# Altium PCB correctCore.PcbDoc (part 1 of 2)
Units mil, origin at the board's own origin, x right, y up, seen from the top; angles counter-clockwise.
Board outline 6000 x 4000 mil, 4 copper layers (Top Layer, Layer 1, Layer 2, Bottom Layer), stack 23.756 mil thick; 90 components, 166 nets, 637 pads, 374 vias.
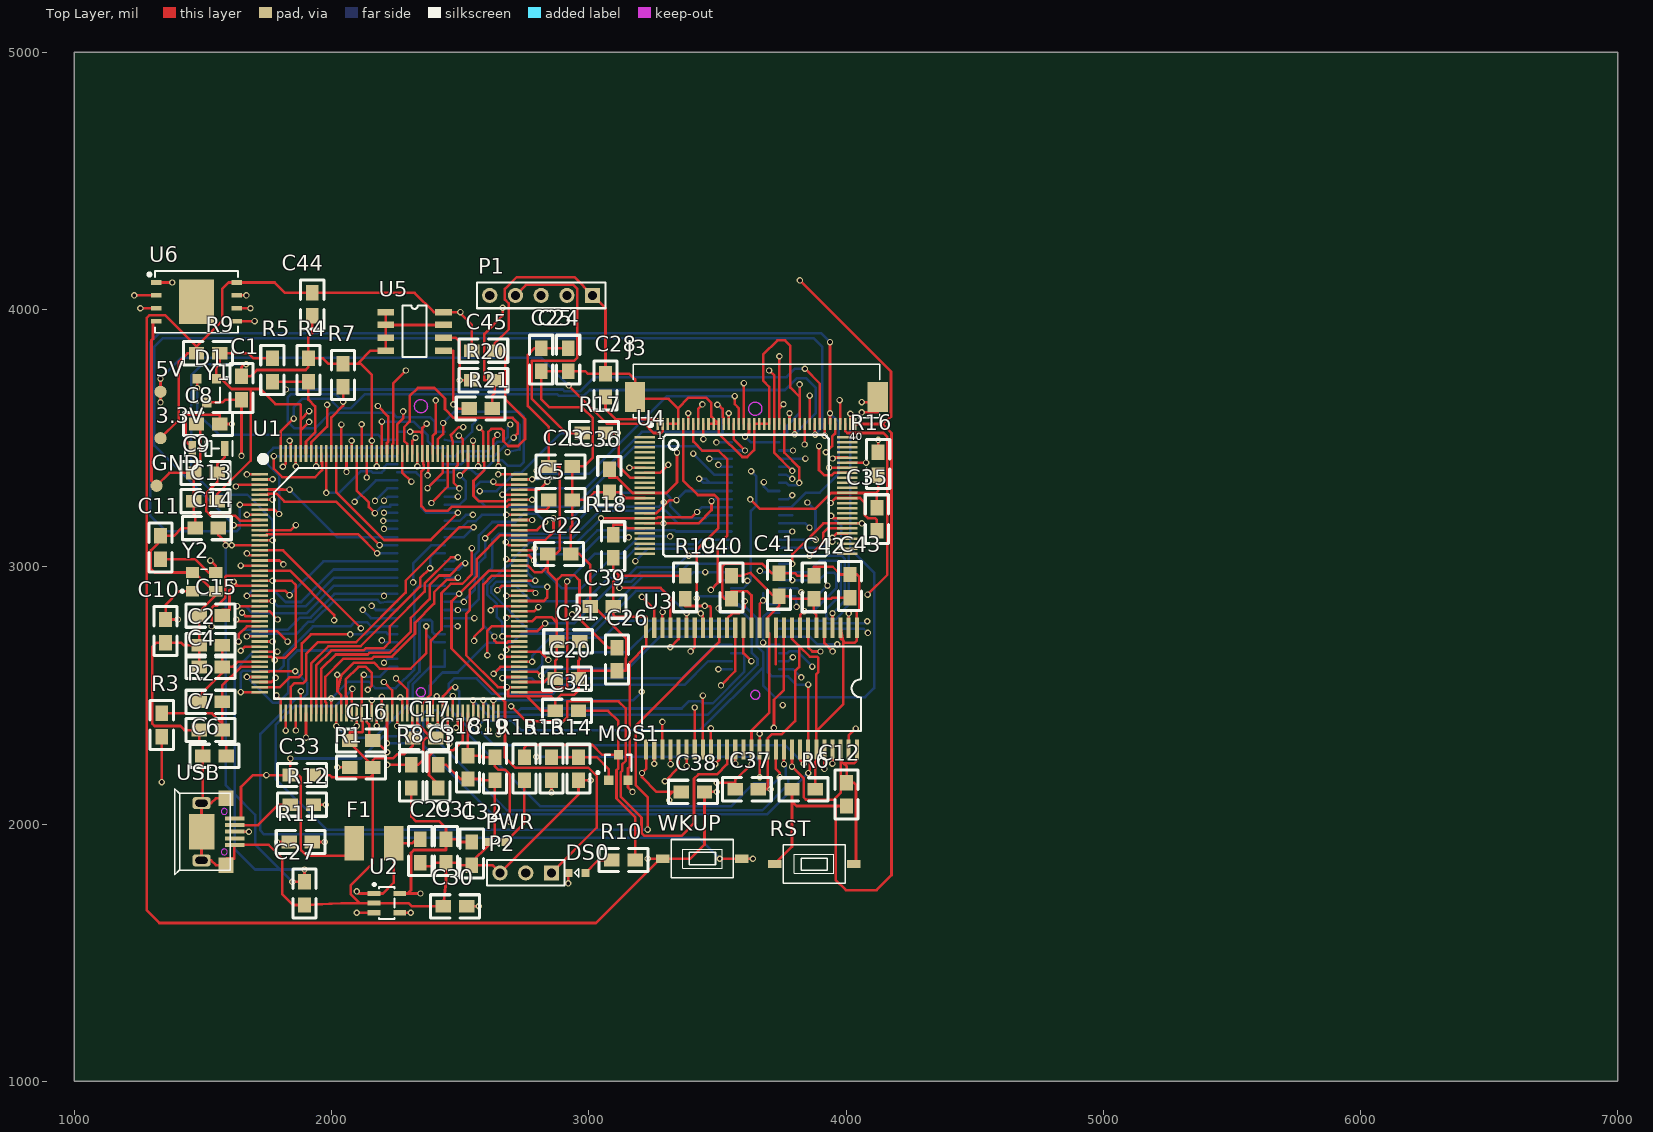
[diagram p0: Top Layer view]
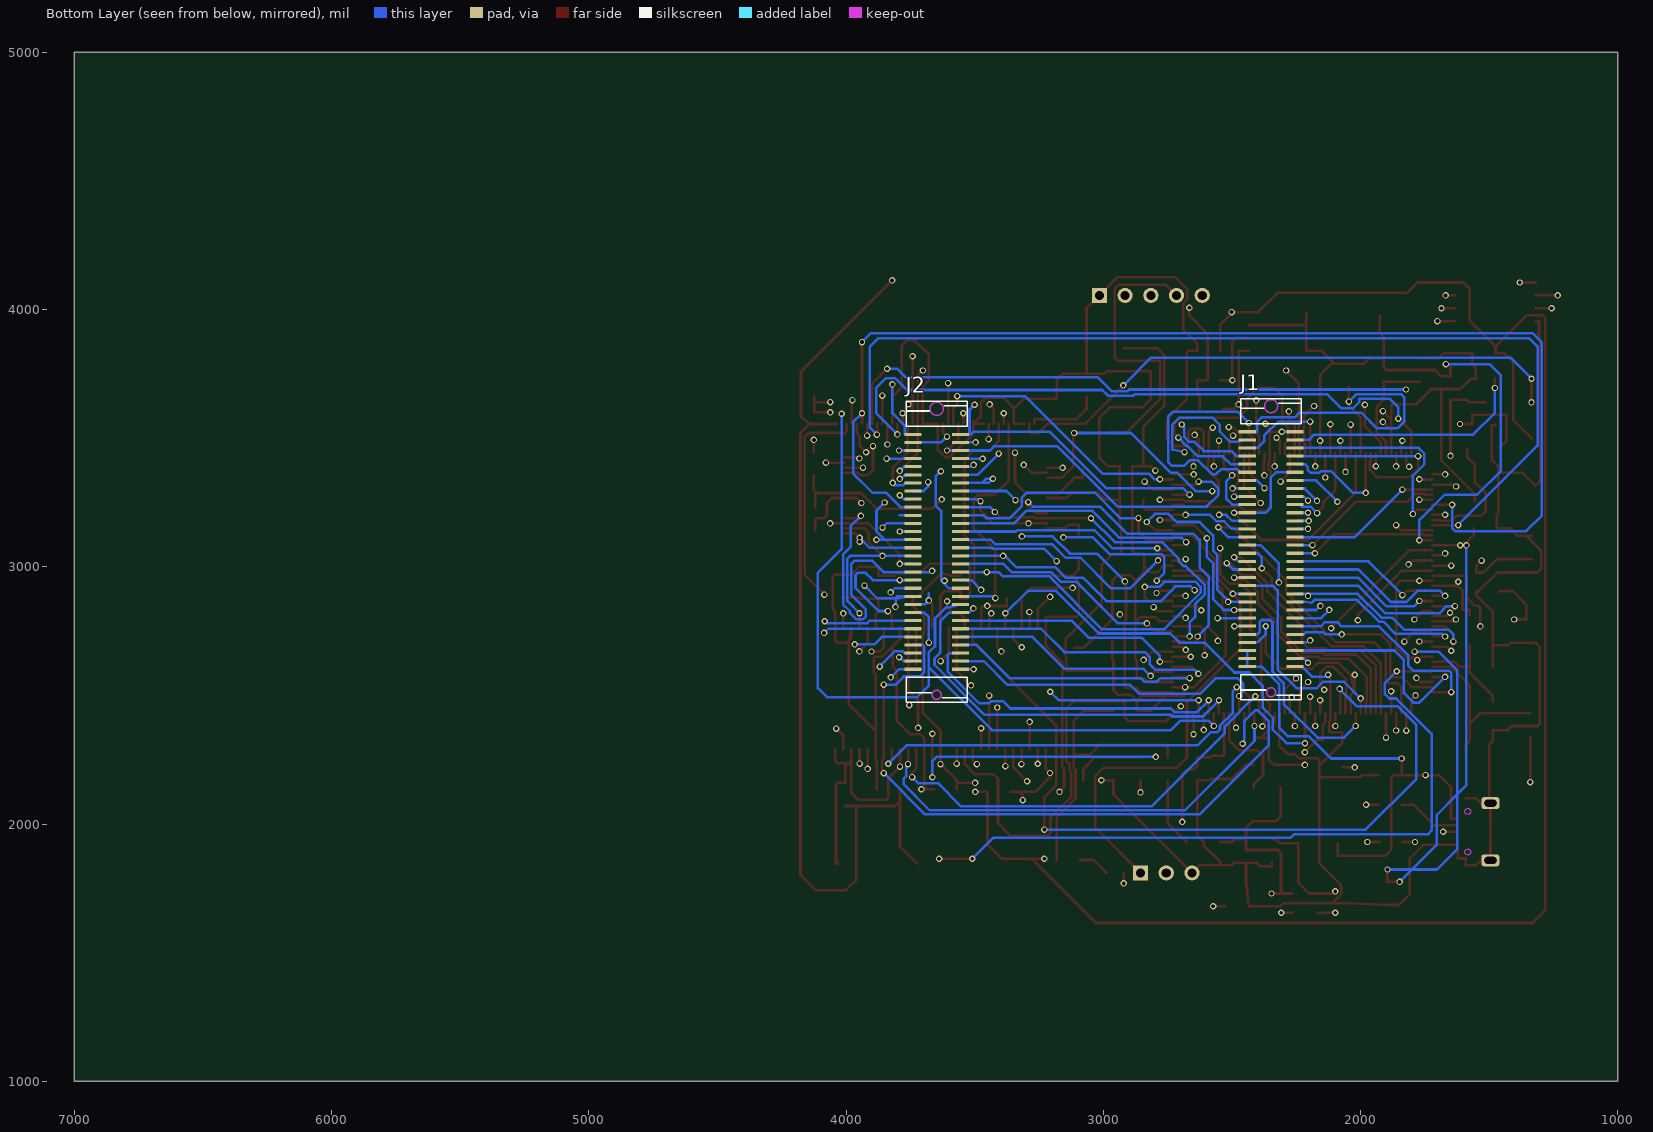
[diagram p1: Bottom Layer view, seen from below]
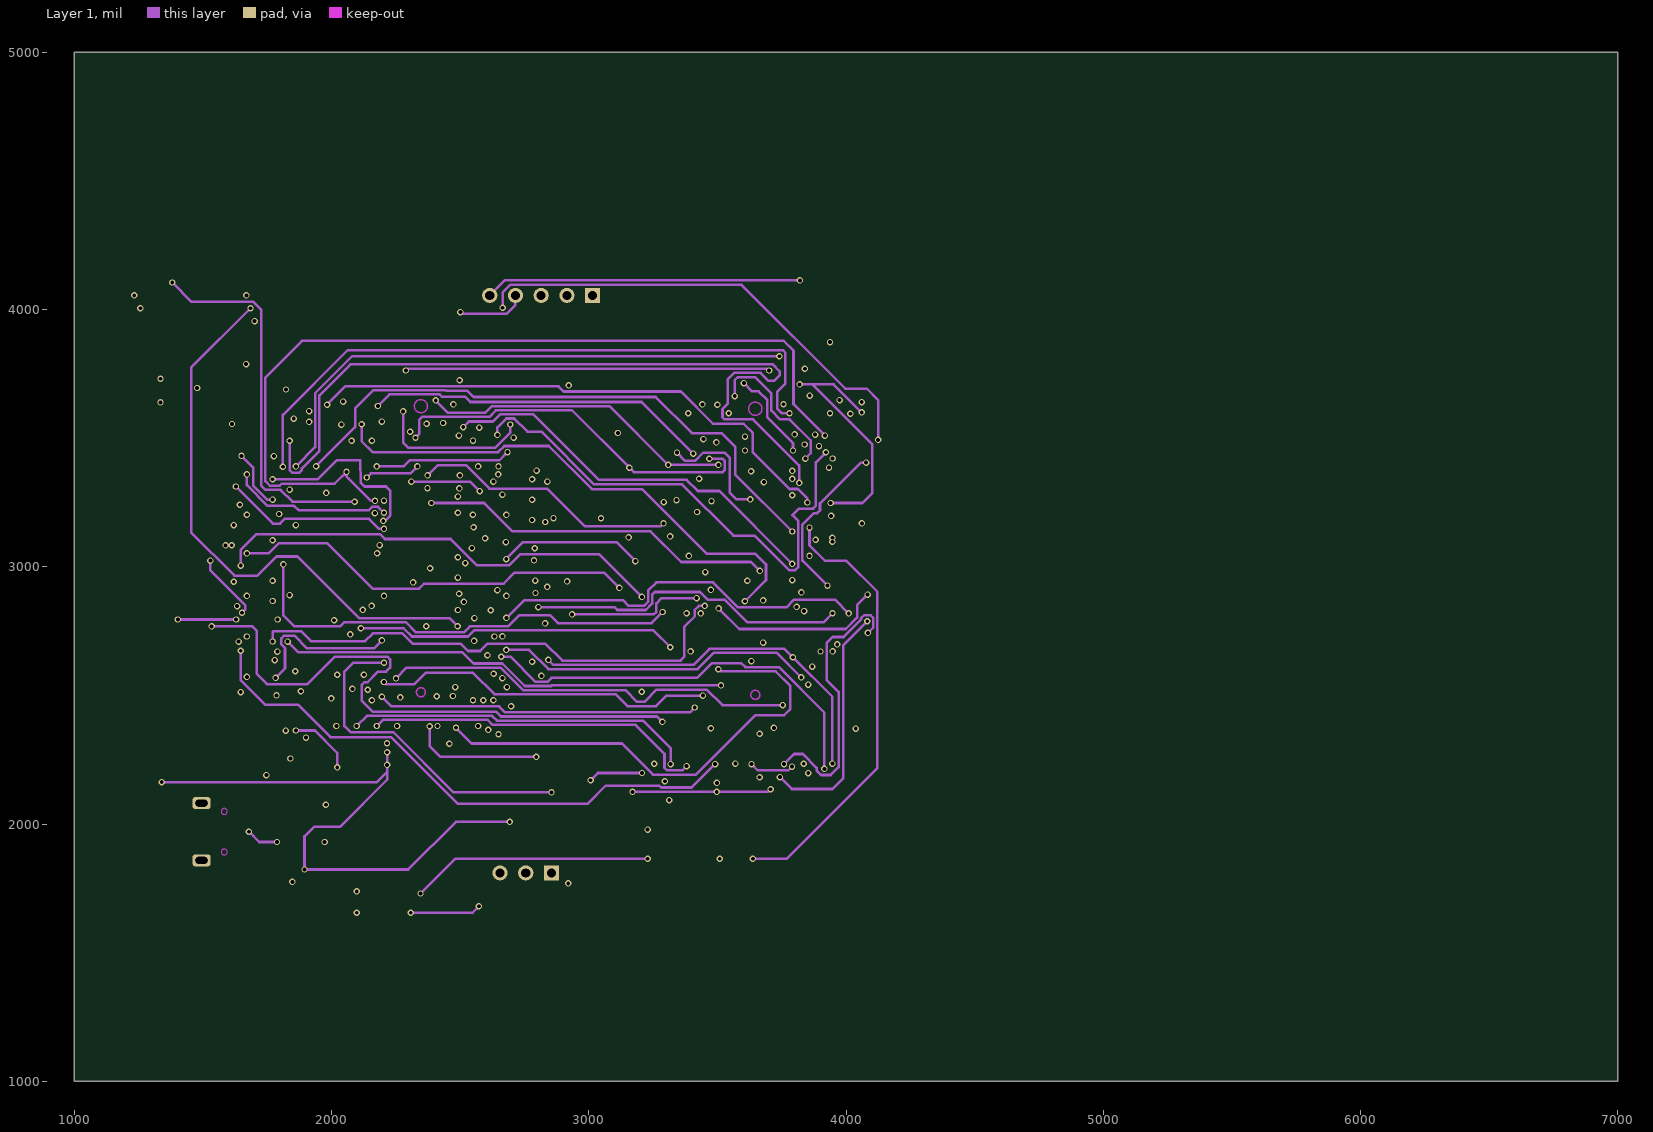
[diagram p2: Layer 1]
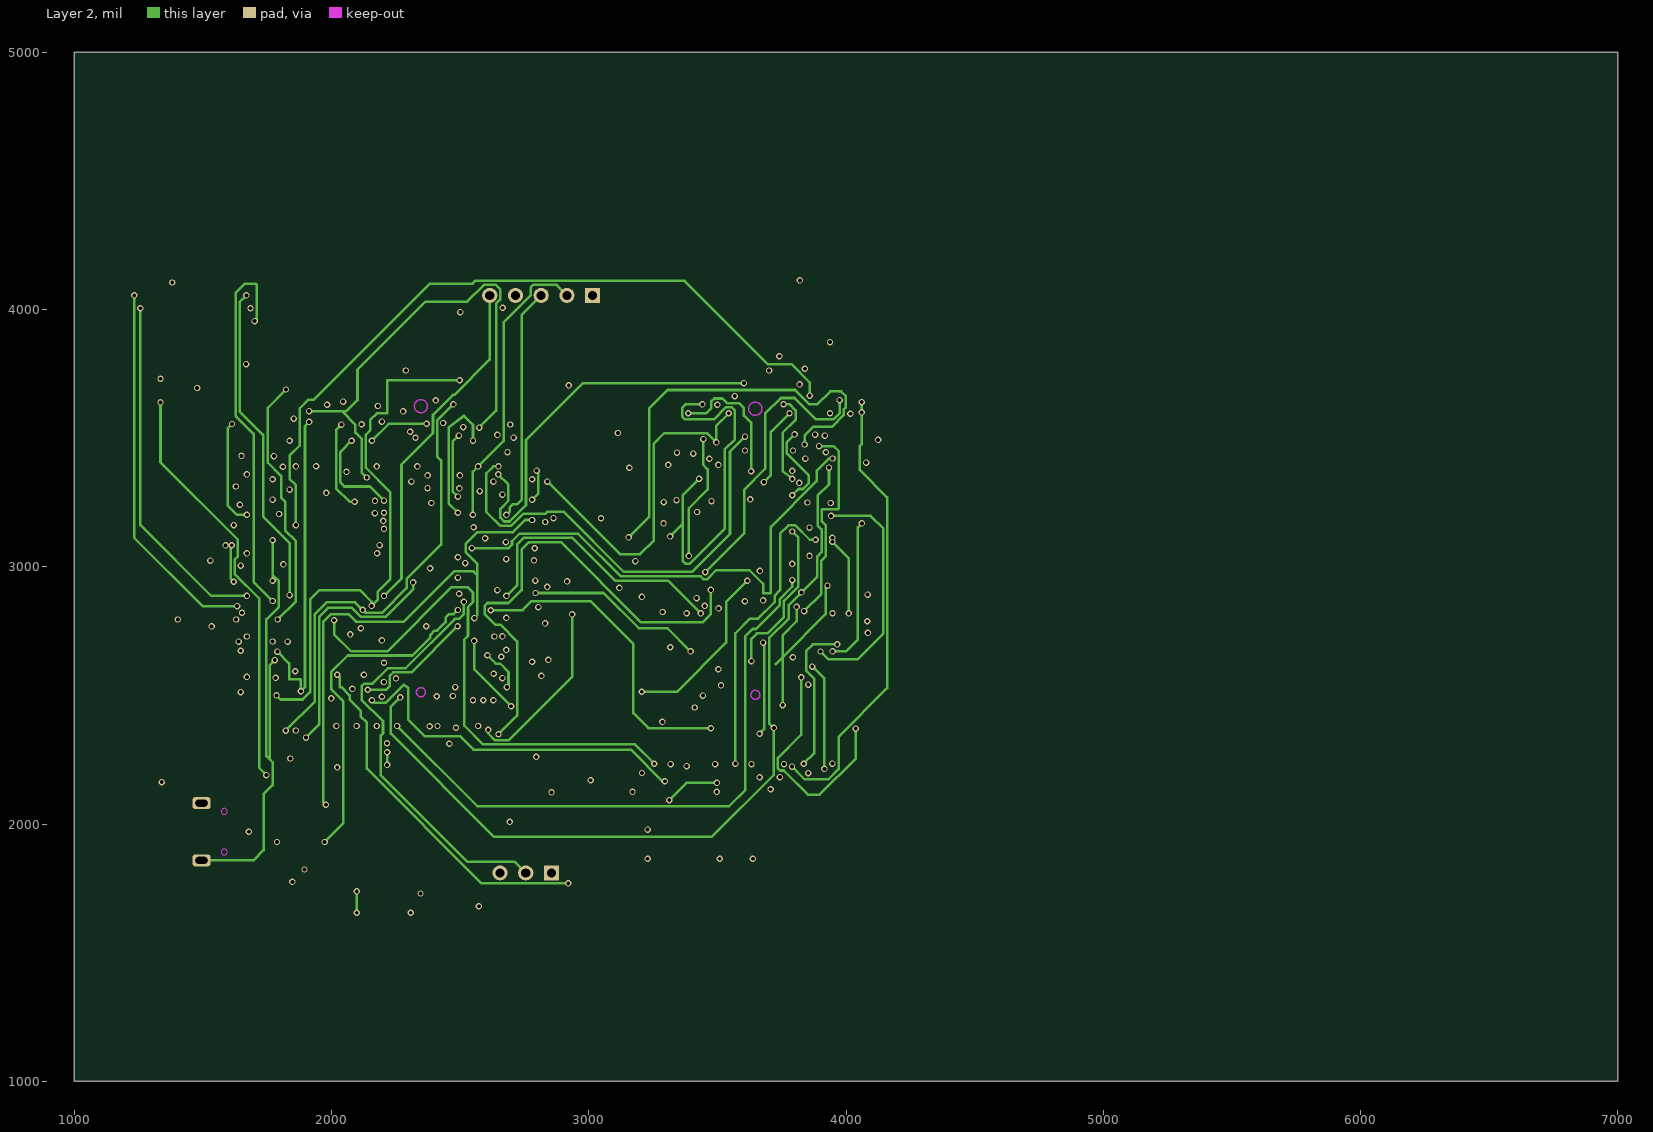
[diagram p3: Layer 2]

## Layer stack, top to bottom
Top Solder: solder mask 0.4, Solder Resist, Dk 3.5
Top Layer: signal copper 1.4
Dielectric 2: prepreg 2.8, PP-006, Dk 4.1
Layer 1: signal copper 1.3779
Dielectric 1: dielectric 12.6, FR-4, Dk 4.8
Layer 2: signal copper 1.3779
Dielectric 3: prepreg 2.8, PP-006, Dk 4.1
Bottom Layer: signal copper 1.4
Bottom Solder: solder mask 0.4, Solder Resist, Dk 3.5

## Board outline
1000,1000 7000,1000 7000,5000 1000,5000

## Design rules (kind name [scope] priority, off if disabled: settings)
Clearance [All] p1: gap=6 ignorepadtopadclearanceinfootprint=TRUE except(0: Arc-Hole Track-Hole SMDPad-Hole THPad-Hole Via-Hole Fill-Hole Poly-Hole Region-Hole Text-Hole)
ComponentClearance [All] p1 off: gap=10 collisioncheckmode=3 verticalgap=10 showdistances=FALSE
DiffPairsRouting [All] p1 off: maxlimit=10 minlimit=10 mostfreqgap=10 toplayer_minwidth=15 toplayer_maxwidth=15 toplayer_prefwidth=15 midlayer1_minwidth=15 midlayer1_maxwidth=15 midlayer1_prefwidth=15 midlayer2_minwidth=15 midlayer2_maxwidth=15 midlayer2_prefwidth=15 bottomlayer_minwidth=15 bottomlayer_maxwidth=15 bottomlayer_prefwidth=15 maxuncoupledlength=500
FanoutControl Fanout_BGA [IsBGA] p1 off: bgadir=Out bgaviamode=Centered fanoutstyle=Auto fanoutdirection=Alternating viagrid=1 // Fanout_BGA (Default Rule)
FanoutControl Fanout_LCC [IsLCC] p2 off: bgadir=Out bgaviamode=Centered fanoutstyle=Auto fanoutdirection=Alternating viagrid=1 // Fanout_LCC (Default Rule)
FanoutControl Fanout_SOIC [IsSOIC] p3 off: bgadir=Out bgaviamode=Centered fanoutstyle=Auto fanoutdirection=Alternating viagrid=1 // Fanout_SOIC (Default Rule)
FanoutControl Fanout_Small [(CompPinCount < 5)] p4 off: bgadir=Out bgaviamode=Centered fanoutstyle=Auto fanoutdirection=OutThenIn viagrid=1 // Fanout_Small (Default Rule)
FanoutControl Fanout_Default [All] p5 off: bgadir=Out bgaviamode=Centered fanoutstyle=Auto fanoutdirection=Alternating viagrid=1 // Fanout_Default (Default Rule)
Height [All] p1 off: minheight=0 maxheight=1000 prefheight=500
ParallelSegment ParallelSegment_1 [InNetClass('fmc') vs InNetClass('spi')] p1: limit=10000 gap=10
ParallelSegment [InNetClass('dcmi') vs InNetClass('dcmi')] p2: limit=10000 gap=10
PolygonConnect [All] p1: connectstyle=Relief reliefconductorwidth=10 reliefentries=4 polygonreliefangle="90 Angle" airgapwidth=10
RoutingCorners [All] p1 off: cornerstyle=45-Degree minsetback=100 maxsetback=100
RoutingPriority [All] p1 off: routingpriority=0
RoutingTopology [All] p1 off: topology=Shortest
RoutingVias [All] p1: holewidth=15 width=25 viastyle="Through Hole" minholewidth=15 minwidth=25 maxholewidth=15 maxwidth=25
SMDToCorner [All] p1: distance=0
SolderMaskExpansion [All] p1: expansion=4
Width [All] p1: maxlimit=10 minlimit=10 preferedwidth=10
19 further rules are at their usual default settings.

## Classes and differential pairs
net class spi: PE2 PE4 PE5 PE6
net class fmc: FMC_A0 FMC_A1 FMC_A2 FMC_A3 FMC_A4 FMC_A5 FMC_A6 FMC_A7 FMC_A8 FMC_A9 FMC_A10 FMC_A11 FMC_A12 FMC_A16_CLE FMC_A17_ALE FMC_A18 FMC_BA0 FMC_BA1 FMC_D0 FMC_D1 FMC_D2 FMC_D3 FMC_D4 FMC_D5 FMC_D6 FMC_D7 FMC_D8 FMC_D9 FMC_D10 FMC_D11 FMC_D12 FMC_D13 FMC_D14 FMC_D15 FMC_NBL0 FMC_NBL1 FMC_NCE3 FMC_NE1 FMC_NOE FMC_NWAIT FMC_NWE FMC_SDCKE0 FMC_SDCLK FMC_SDNCAS FMC_SDNE0 FMC_SDNRAS FMC_SDNWE
net class dcmi: DCMI_D0 DCMI_D1 DCMI_D2 DCMI_D3 DCMI_D4 DCMI_D5 DCMI_D6 DCMI_D7 DCMI_HREF DCMI_PLCK DCMI_SCL DCMI_SDA DCMI_XCLK
component class stm: C1 C2 C3 C4 C5 C6 C7 C8 C9 C10 C11 C12 C13 C14 C15 C16 C17 C18 C19 C20 C21 C22 C23 C24 C25 C26 C27 D1 J1 J2 P1 R1 R2 R3 R4 R5 R6 R7 R8 R9 RST U1 Y1 Y2
component class mem: C35 C36 C37 C38 C39 C40 C41 C42 C43 C44 C45 R16 R17 R18 R19 R20 R21 U3 U4 U5 U6
component class circuit: 3.3V 5V C28 C29 C30 C31 C32 C33 C34 DS0 F1 GND J3 MOS1 P2 PWR R10 R11 R12 R13 R14 R15 U2 USB WKUP

## Components (designator, comment, footprint, x,y, rotation, side; value= is the part's Value field where it differs from the comment)
3.3V "TEST POINT" TP-1.5 1335,3500 r90 top
5V "TEST POINT" TP-1.5 1335,3680 r0 top
C1 "104" 0805 1649.94,3650 r90 top
C2 "104" 0805 1485,2695.06 r0 top
C3 "225" 0805 2415,2140 r90 top
C4 "225" 0805 1485,2611.05 r0 top
C5 "225" 0805 2845,3260.06 r0 top
C6 "10uF" 0805 1500,2265.06 r0 top
C7 "104" 0805 1485,2365.06 r0 top
C8 "6pF" 0805 1475,3555 r0 top
C9 "6pF" 0805 1465,3365.06 r0 top
C10 "22pF" 0805 1354.94,2705 r90 top
C11 "22pF" 0805 1335,3120 r270 top
C12 "104" 0805 4002.02,2070 r90 top
C13 "104" 0805 1464.94,3255 r0 top
C14 "104" 0805 1470,3150.06 r0 top
C15 "104" 0805 1485,2810.06 r0 top
C16 "104" 0805 2070,2325.06 r0 top
C17 "104" 0805 2315,2335.06 r0 top
C18 "104" 0805 2530,2175 r90 top
C19 "104" 0805 2634.94,2170 r90 top
C20 "104" 0805 2960,2564.94 r180 top
C21 "104" 0805 2965,2710 r180 top
C22 "104" 0805 2930,3049.94 r180 top
C23 "104" 0805 2935,3390 r180 top
C24 "104" 0805 2919.94,3760 r90 top
C25 "104" 0805 2815,3760 r90 top
C26 "104" 0805 3109.94,2595 r90 top
C27 "104" 0805 1894.94,1685 r90 top
C28 "104" 0805 3065,3750 r270 top
C29 "10uF" 0805 2344.94,1850 r90 top
C30 "103" 0805 2435,1680.06 r0 top
C31 "104" 0805 2444.94,1850 r90 top
C32 "10uF" 0805 2544.94,1840 r90 top
C33 "104" 0805 1840,2190.06 r0 top
C34 "104" 0805 2960,2439.94 r180 top
C35 "104" 0805 4119.94,3140 r90 top
C36 "104" 0805 3079.94,3289.37 r90 top
C37 "104" 0805 3569.53,2135.06 r0 top
C38 "104" 0805 3360,2125.06 r0 top
C39 "104" 0805 3005,2845.06 r0 top
C40 "104" 0805 3555.06,2965 r270 top
C41 "104" 0805 3739.98,2885 r90 top
C42 "104" 0805 3874.94,2875 r90 top
C43 "104" 0805 4015,2880 r90 top
C44 "104" 0805 1925.06,4065 r270 top
C45 "104" 0805 2545,3840.06 r0 top
D1 "BAT54C" SOT-23 1515,3690 r180 top
DS0 "LED" SMDLED-0603 2986.93,1810 r180 top
F1 "1812L075PR" *1812 2165,1925 r0 top
GND "TEST POINT" TP-1.5 1320,3315 r90 top
J1 "3710M060046G3FT01" 3710F060046G3FT01 2440,2611.54 r0 bottom
J2 "3710M060046G3FT01" 3710F060046G3FT01 3740.04,2601.54 r0 bottom
J3 "RGBLCD" FPC-TOP40 3268.58,3551.57 r0 top
MOS1 "SI2301" SO-G3/C2.5 3115,2220 r0 top
P1 "SWD" HDR1X5 3015,4055 r180 top
P2 "USART1" HDR1X3 2855,1810 r180 top
PWR "LED" SMDLED-0603 2676.93,1930 r180 top
R1 "10K" 0805 2070,2220.06 r0 top
R2 "10R" 0805 1485,2475.06 r0 top
R3 "10R" 0805 1340,2430 r270 top
R4 "0R" 0805 1910,3720 r90 top
R5 "0R" 0805 1769.94,3720 r90 top
R6 "10K" 0805 3790,2135 r0 top
R7 "100K" 0805 2045,3700 r90 top
R8 "0R" 0805 2309.94,2140 r90 top
R9 "0R" 0805 1475,3830 r0 top
R10 "1K" 0805 3180,1859.94 r180 top
R11 "10R" 0805 1925,1929.94 r180 top
R12 "10R" 0805 1930,2074.94 r180 top
R13 "10R" 0805 2854.94,2170 r90 top
R14 "100K" 0805 2959.94,2170 r90 top
R15 "1K" 0805 2749.94,2170 r90 top
R16 "0R" 0805 4124.94,3355 r90 top
R17 "10K" 0805 2975,3520.06 r0 top
R18 "10K" 0805 3095.06,3125 r270 top
R19 "10K" 0805 3375,2965 r270 top
R20 "4.7K" 0805 2545,3725.06 r0 top
R21 "4.7K" 0805 2535,3615.06 r0 top
RST "KEY_M" KEY_SOP3625 3722.91,1845 r0 top
U1 "STM32F767IGT6" LQFP176 1720.91,3358.98 r0 top
U2 "CAT6219-330TD" SOT-23-5 2165,1729.8 r0 top
U3 "W9825G6KH" TSOP54 4041.97,2762.44 r270 top
U4 "MT29F4G08" TSOP48 3217.6,3503.42 r0 top
U5 "24C02" SOP-8 2210.59,3990 r0 top
U6 "W25Q256" WSON8 1475,4030 r0 top
USB "USB-AB" "USB_AB - 5S - B" 1410,1970 r90 top
WKUP "KEY_UP" KEY_SOP3625 3595,1865 r180 top
Y1 "32.768KHz" XTAL3215 1459.02,3460 r0 top
Y2 "25Mhz" XTAL3225 1459.45,2905 r0 top

## Footprints (in the part's own frame and the unit in brackets; to place one, negate y for a bottom-side part, rotate by r counter-clockwise, add the part's x,y. Pads: shape width x height; smd on the part's side, far side on the other; paste and mask are expansions set on the pad)
0805 [mil]
  rect 60x50 smd: 1(0,-0.06) 2(90,-0.06)
  silkscreen extent -50,-45 140,45
3710F060046G3FT01 [mm]
  rect 1.7x0.3 smd: 1(-4.7,0) 2(-4.7,-0.8) 3(-4.7,-1.6) 4(-4.7,-2.4) 5(-4.7,-3.2) 6(-4.7,-4) 7(-4.7,-4.8) 8(-4.7,-5.6) 9(-4.7,-6.4) 10(-4.7,-7.2) 11(-4.7,-8) 12(-4.7,-8.8) 13(-4.7,-9.6) 14(-4.7,-10.4) 15(-4.7,-11.2) 16(-4.7,-12) 17(-4.7,-12.8) 18(-4.7,-13.6) 19(-4.7,-14.4) 20(-4.7,-15.2) 21(-4.7,-16) 22(-4.7,-16.8) 23(-4.7,-17.6) 24(-4.7,-18.4) 25(-4.7,-19.2) 26(-4.7,-20) 27(-4.7,-20.8) 28(-4.7,-21.6) 29(-4.7,-22.4) 30(-4.7,-23.2) 31(0,-23.2) 32(0,-22.4) 33(0,-21.6) 34(0,-20.8) 35(0,-20) 36(0,-19.2) 37(0,-18.4) 38(0,-17.6) 39(0,-16.8) 40(0,-16) 41(0,-15.2) 42(0,-14.4) 43(0,-13.6) 44(0,-12.8) 45(0,-12) 46(0,-11.2) 47(0,-10.4) 48(0,-9.6) 49(0,-8.8) 50(0,-8) 51(0,-7.2) 52(0,-6.4) 53(0,-5.6) 54(0,-4.8) 55(0,-4) 56(0,-3.2) 57(0,-2.4) 58(0,-1.6) 59(0,-0.8) 60(0,0)
  Keep-Out Layer circle w0.152: c-2.35,2.525 r0.45
  Keep-Out Layer circle w0.152: c-2.35,-25.725 r0.65
  silkscreen extent -5.35,-26.48 0.65,3.27
*1812 [mm]
  rect 1.9x3.4 smd: 1(-1.95,0) 2(1.95,0)
FPC-TOP40 [mm]
  rect 0.25x1.2 smd: 1(0,0.102) 2(0.5,0.102) 3(1,0.102) 4(1.5,0.102) 5(2,0.102) 6(2.5,0.102) 7(3,0.102) 8(3.5,0.102) 9(4,0.102) 10(4.5,0.102) 11(5,0.102) 12(5.5,0.102) 13(6,0.102) 14(6.5,0.102) 15(7,0.102) 16(7.5,0.102) 17(8,0.102) 18(8.5,0.102) 19(9,0.102) 20(9.5,0.102) 21(10,0.102) 22(10.5,0.102) 23(11,0.102) 24(11.5,0.102) 25(12,0.102) 26(12.5,0.102) 27(13,0.102) 28(13.5,0.102) 29(14,0.102) 30(14.5,0.102) 31(15,0.102) 32(15.5,0.102) 33(16,0.102) 34(16.5,0.102) 35(17,0.102) 36(17.5,0.102) 37(18,0.102) 38(18.5,0.102) 39(19,0.102) 40(19.5,0.102)
  rect 2x3 smd: A(-2.25,2.754) B(21.725,2.754)
  silkscreen extent -2.45,-0.15 21.92,5.97
HDR1X3 [mm]
  rect 1.5x1.5 hole 0.9: 1(0,0)
  round 1.5 hole 0.9: 2(2.54,0) 3(5.08,0)
  silkscreen extent -1.27,-1.27 6.35,1.27
HDR1X5 [mm]
  rect 1.5x1.5 hole 0.9: 1(0,0)
  round 1.5 hole 0.9: 2(2.54,0) 3(5.08,0) 4(7.62,0) 5(10.16,0)
  silkscreen extent -1.27,-1.27 11.43,1.27
KEY_SOP3625 [mm]
  rect 1.3x0.8 smd: 1(0,0) 2(7.8,0)
  silkscreen extent 0.85,-1.9 6.95,1.9
LQFP176 [mm]
  rect 1.65x0.254 smd: 1(0,0) 2(0,-0.5) 3(0,-1) 4(0,-1.5) 5(0,-2) 6(0,-2.5) 7(0,-3) 8(0,-3.5) 9(0,-4) 10(0,-4.5) 11(0,-5) 12(0,-5.5) 13(0,-6) 14(0,-6.5) 15(0,-7) 16(0,-7.5) 17(0,-8) 18(0,-8.5) 19(0,-9) 20(0,-9.5) 21(0,-10) 22(0,-10.5) 23(0,-11) 24(0,-11.5) 25(0,-12) 26(0,-12.5) 27(0,-13) 28(0,-13.5) 29(0,-14) 30(0,-14.5) 31(0,-15) 32(0,-15.5) 33(0,-16) 34(0,-16.5) 35(0,-17) 36(0,-17.5) 37(0,-18) 38(0,-18.5) 39(0,-19) 40(0,-19.5) 41(0,-20) 42(0,-20.5) 43(0,-21) 44(0,-21.5) 89(25.631,-21.5) 90(25.631,-21) 91(25.631,-20.5) 92(25.631,-20) 93(25.631,-19.5) 94(25.631,-19) 95(25.631,-18.5) 96(25.631,-18) 97(25.631,-17.5) 98(25.631,-17) 99(25.631,-16.5) 100(25.631,-16) 101(25.631,-15.5) 102(25.631,-15) 103(25.631,-14.5) 104(25.631,-14) 105(25.631,-13.5) 106(25.631,-13) 107(25.631,-12.5) 108(25.631,-12) 109(25.631,-11.5) 110(25.631,-11) 111(25.631,-10.5) 112(25.631,-10) 113(25.631,-9.5) 114(25.631,-9) 115(25.631,-8.5) 116(25.631,-8) 117(25.631,-7.5) 118(25.631,-7) 119(25.631,-6.5) 120(25.631,-6) 121(25.631,-5.5) 122(25.631,-5) 123(25.631,-4.5) 124(25.631,-4) 125(25.631,-3.5) 126(25.631,-3) 127(25.631,-2.5) 128(25.631,-2) 129(25.631,-1.5) 130(25.631,-1) 131(25.631,-0.5) 132(25.631,0)
  rect 0.254x1.65 smd: 45(2.065,-23.566) 46(2.566,-23.566) 47(3.066,-23.566) 48(3.565,-23.566) 49(4.066,-23.566) 50(4.565,-23.566) 51(5.066,-23.566) 52(5.565,-23.566) 53(6.066,-23.566) 54(6.565,-23.566) 55(7.066,-23.566) 56(7.565,-23.566) 57(8.066,-23.566) 58(8.565,-23.566) 59(9.066,-23.566) 60(9.565,-23.566) 61(10.066,-23.566) 62(10.565,-23.566) 63(11.066,-23.566) 64(11.565,-23.566) 65(12.066,-23.566) 66(12.565,-23.566) 67(13.066,-23.566) 68(13.565,-23.566) 69(14.066,-23.566) 70(14.565,-23.566) 71(15.066,-23.566) 72(15.566,-23.566) 73(16.066,-23.566) 74(16.566,-23.566) 75(17.065,-23.566) 76(17.566,-23.566) 77(18.065,-23.566) 78(18.566,-23.566) 79(19.065,-23.566) 80(19.566,-23.566) 81(20.065,-23.566) 82(20.566,-23.566) 83(21.065,-23.566) 84(21.566,-23.566) 85(22.065,-23.566) 86(22.566,-23.566) 87(23.065,-23.566) 88(23.566,-23.566) 133(23.566,2.065) 134(23.065,2.065) 135(22.566,2.065) 136(22.065,2.065) 137(21.566,2.065) 138(21.065,2.065) 139(20.566,2.065) 140(20.065,2.065) 141(19.566,2.065) 142(19.065,2.065) 143(18.566,2.065) 144(18.065,2.065) 145(17.566,2.065) 146(17.065,2.065) 147(16.566,2.065) 148(16.066,2.065) 149(15.566,2.065) 150(15.066,2.065) 151(14.565,2.065) 152(14.066,2.065) 153(13.565,2.065) 154(13.066,2.065) 155(12.565,2.065) 156(12.066,2.065) 157(11.565,2.065) 158(11.066,2.065) 159(10.565,2.065) 160(10.066,2.065) 161(9.565,2.065) 162(9.066,2.065) 163(8.565,2.065) 164(8.066,2.065) 165(7.565,2.065) 166(7.066,2.065) 167(6.565,2.065) 168(6.066,2.065) 169(5.565,2.065) 170(5.066,2.065) 171(4.565,2.065) 172(4.066,2.065) 173(3.565,2.065) 174(3.066,2.065) 175(2.566,2.065) 176(2.065,2.065)
  silkscreen extent 0.04,-22.15 24.22,1.82
SMDLED-0603 [mil]
  rect 32x32 smd: 1(0,0) 2(66.93,0)
  silkscreen extent 26,-17 42,17
SO-G3/C2.5 [mm]
  rect 0.9x0.95 smd: 1(-0.95,-1.25) 2(0.95,-1.25) 3(0,1.25)
  silkscreen extent -2.15,-0.63 1.3,1.25
SOP-8 [mil]
  rect 65x25 smd: 1(0,0) 2(0,-50) 3(0,-100) 4(0,-150) 5(224.41,-150) 6(224.41,-100) 7(224.41,-50) 8(224.41,0)
  silkscreen extent 65,-175 159,25
SOT-23 [mm]
  rect 0.9x0.95 smd: 1(-0.95,-1.048) 2(0.95,-1.048) 3(0,1.302)
  silkscreen extent -2.07,-1.17 1.3,1.3
SOT-23-5 [mil]
  rect 50x20 smd: 1(0,0) 2(0,-37.4) 3(0,-74.8) 4(100,-74.8) 5(100,0)
  silkscreen extent 0,-99 80,35
TP-1.5 [mm]
  round 1.2 smd: 1(0,0)
TSOP48 [mm]
  rect 2x0.25 smd: 1(0,0) 2(0,-0.5) 3(0,-1) 4(0,-1.5) 5(0,-2) 6(0,-2.5) 7(0,-3) 8(0,-3.5) 9(0,-4) 10(0,-4.5) 11(0,-5) 12(0,-5.5) 13(0,-6) 14(0,-6.5) 15(0,-7) 16(0,-7.5) 17(0,-8) 18(0,-8.5) 19(0,-9) 20(0,-9.5) 21(0,-10) 22(0,-10.5) 23(0,-11) 24(0,-11.5) 25(20,-11.5) 26(20,-11) 27(20,-10.5) 28(20,-10) 29(20,-9.5) 30(20,-9) 31(20,-8.5) 32(20,-8) 33(20,-7.5) 34(20,-7) 35(20,-6.5) 36(20,-6) 37(20,-5.5) 38(20,-5) 39(20,-4.5) 40(20,-4) 41(20,-3.5) 42(20,-3) 43(20,-2.5) 44(20,-2) 45(20,-1.5) 46(20,-1) 47(20,-0.5) 48(20,0)
  silkscreen extent 1.83,-11.75 18.17,0.25
TSOP54 [mm]
  rect 2x0.4 smd: 1(0,0) 2(0,-0.8) 3(0,-1.6) 4(0,-2.4) 5(0,-3.2) 6(0,-4) 7(0,-4.8) 8(0,-5.6) 9(0,-6.4) 10(0,-7.2) 11(0,-8) 12(0,-8.8) 13(0,-9.6) 14(0,-10.4) 15(0,-11.2) 16(0,-12) 17(0,-12.8) 18(0,-13.6) 19(0,-14.4) 20(0,-15.2) 21(0,-16) 22(0,-16.8) 23(0,-17.6) 24(0,-18.4) 25(0,-19.2) 26(0,-20) 27(0,-20.8) 28(12,-20.8) 29(12,-20) 30(12,-19.2) 31(12,-18.4) 32(12,-17.6) 33(12,-16.8) 34(12,-16) 35(12,-15.2) 36(12,-14.4) 37(12,-13.6) 38(12,-12.8) 39(12,-12) 40(12,-11.2) 41(12,-10.4) 42(12,-9.6) 43(12,-8.8) 44(12,-8) 45(12,-7.2) 46(12,-6.4) 47(12,-5.6) 48(12,-4.8) 49(12,-4) 50(12,-3.2) 51(12,-2.4) 52(12,-1.6) 53(12,-0.8) 54(12,0)
  silkscreen extent 1.83,-21.2 10.16,0.4
"USB_AB - 5S - B" [mm]
  rect 0.4x1.9 smd: 1(1.3,-5.436) 2(0.65,-5.436) 3(0,-5.436) 4(-0.65,-5.436) 5(-1.3,-5.436)
  rrect50% 1.2x1.8 hole 0.7 slot 1.2 at 90 deg: 6(2.825,-2.15) 7(-2.825,-2.15)
  rect 1.5x1.5 smd: 8(-3.302,-4.572) 9(3.302,-4.572)
  rect 3.5x2.5 smd: 9(0,-2.159)
  Keep-Out Layer circle w0.102: c2,-4.4 r0.3
  Keep-Out Layer circle w0.102: c-2,-4.4 r0.3
  silkscreen extent -4.26,-5 4.26,0.51
WSON8 [mm]
  rect 1x0.45 smd: 1(-3.975,1.905) 2(-3.975,0.635) 3(-3.975,-0.635) 4(-3.975,-1.905) 5(3.975,-1.905) 6(3.975,-0.635) 7(3.975,0.635) 8(3.975,1.905)
  rect 3.5x4.4 smd: 9(0,0)
  silkscreen extent -4.8,-3.05 4.1,3.05
XTAL3215 [mm]
  rect 0.75x1.5 smd: 1(0,0) 2(3.2,0)
  silkscreen extent -0.74,-0.75 3.94,0.75
XTAL3225 [mm]
  rect 1.3x1.05 smd: 1(0,0) 2(2.3,0) 3(2.3,1.85) 4(0,1.85)
  silkscreen extent -1.14,-0.33 2.74,2.17

## Part data
3.3V 5V GND: library part TEST-POINT, "测试点"
C1 C2 C3 C4 C5 C6 C7 C8 C9 C10 C11 C12 C13 C14 C15 C16 C17 C18 C19 C20 C21 C22 C23 C24 C25 C26 C27 C28 C29 C30 C31 C32 C33 C34 C35 C36 C37 C38 C39 C40 C41 C42 C43 C44 C45: library part C
D1: "双肖特基二极管"
F1: "PTC Resettable Fuse 0.75A_hold_ 1.5A_trip_ 13.2VDC 100A 0.8W 0.2s 0.1Ohm SMD Solder Pad 1812 T/R", Package="1812 Littelfuse", Availability=Unavailable, MF="Littelfuse Inc.", MP=1812L075PR, Price=None, SnapEDA_Link=https://www.snapeda.com/parts/1812L075PR/Littelfuse%20Inc./view-part/?ref=snap
J1 J2: library part 3710F, "3710F060046G3FT01"
J3: library part FPC-40, "FPC-40P-0.5mm"
MOS1: library part MOS-P, "IRLML6401/SI2301"
P1: library part "Header 5", "Header, 5-Pin", LatestRevisionDate=17-Jul-2002, LatestRevisionNote="Re-released for DXP Platform.", Publisher="Altium Limited"
P2: library part "Header 3", "Header, 3-Pin", LatestRevisionDate=17-Jul-2002, LatestRevisionNote="Re-released for DXP Platform.", Publisher="Altium Limited"
R1 R2 R3 R4 R5 R6 R7 R8 R9 R10 R11 R12 R13 R14 R15 R16 R17 R18 R19 R20 R21: library part R
U2: "3.3V 500mA LDO"
U3: library part IS42S16160B, "32MB SDRAM"
U4: library part K9F2G08U0C, "256MB NAND FLASH"
U5: library part 24C256, "EEPROM"
U6: library part W25Q128, "W25Q128"
USB: "MicroUSB"
WKUP: library part KEY_M
Y1: library part XTAL, "普通晶振"
Y2: library part XTAL_3225, "3225贴片无源晶振"

## Via types
v1: diameter 25, hole 15, Top Layer to Bottom Layer, 374 vias

## Nets (pads, with @x,y where several pads share a name; then routed paths per layer and width w, separated by ;. In a path a pad name is that pad's centre, name@x,y a point inside that pad or via, vN(x,y) a via of type N, cw(c..) or ccw(c..) an arc to the next point about the centre after c; other vN are vias at no path point)
1WIRE_DQ: J2.4 U1.92 | length 1024.4
  Top Layer w10: v1(2664,2567) 2668.57,2571.57 U1.92@2730,2571.57
  Bottom Layer w10: v1(2664,2567) 2777.74,2567 2792.24,2552.5 2839.24,2552.5 2853.74,2567 3363.6,2567 3492.62,2696.02 J2.4@3555,2696.02
BOOT0: J1.31 R7.1 U1.166 | length 1304.6
  Top Layer w10: U1.166@1999.08,3440.29 1999.08,3581 2045.06,3626.99 v1@2045.06,3642.06 ; v1(2045,3642) v1@2045.06,3642.06 ; R7.1@2045.06,3700 v1@2045.06,3642.06
  Bottom Layer w10: v1(2045,3642) 2017,3670 1841,3670 1829,3658 1829,3565 1856,3538 1936,3538 1997,3599 2236.5,3599 2255,3580.5 2384,3580.5 2402,3562.5 2402,3524.92 J1.31@2440,3524.92
DCMI_D0: J2.16 U1.115 | length 1008.9
  Top Layer w10: v1(2679,3030) 2684.67,3024.33 U1.115@2730,3024.33
  Layer 1 w10: v1(2679,3030) 2745,3096 3107,3096 v1(3181,3022)
  Bottom Layer w10: v1(3181,3022) 3229.79,3070.79 3431,3070.79 3434.18,3073.98 J2.16@3555,3073.98
DCMI_D1: J2.17 U1.116 | length 956.5
  Top Layer w10: U1.116@2730,3044.02 2767.98,3044.02 v1(2787,3025)
  Bottom Layer w10: v1(2787,3025) 2896,2916 2969,2916 3088,3035 3146.1,3035 3197.9,3086.79 3419.32,3086.79 3438,3105.47 J2.17@3555,3105.47
DCMI_D2: J2.18 U1.117 | length 859.5
  Top Layer w10: U1.117@2730,3063.7 2781.7,3063.7 v1(2790,3072)
  Bottom Layer w10: v1(2790,3072) 2964,3072 3034,3142 3333.97,3142 3339,3136.97 J2.18@3555,3136.97
DCMI_D3: J2.19 U1.118 | length 1005.3
  Top Layer w10: v1(2678,3096) 2690.61,3083.39 U1.118@2730,3083.39
  Bottom Layer w10: v1(2678,3096) 2694,3112 2937.01,3112 3043.01,3218 3298,3218 3347.54,3168.46 J2.19@3555,3168.46
DCMI_D4: J1.39 U1.140 | length 382.5
  Top Layer w10: v1(2494.89,3510) 2510.89,3494 U1.140@2510.89,3440.29
  Layer 2 w10: v1(2491,3273) 2471,3293 2471,3486.11 v1(2494.89,3510)
  Bottom Layer w10: J1.39@2440,3272.95 v1(2491,3273) v1(2491,3273)
DCMI_D5: J1.36 U1.145 | length 1002.1
  Top Layer w10: U1.145@2412.46,3440.29 2412.46,3494.46 2434,3516 v1(2434,3559)
  Bottom Layer w10: v1(2434,3559) 2478,3603 2729,3603 2748,3584 2748,3408 2732,3392 2685.5,3392 2664,3413.5 2631.5,3413.5 2578,3360 2562,3360 2543,3379 2479.56,3379 2468,3367.44 J1.36@2440,3367.44
DCMI_D6: J1.26 U1.167 | length 486.4
  Top Layer w10: U1.167@1979.39,3440.29 1979.39,3412.81 1979.52,3412.81 v1(1979.52,3287)
  Bottom Layer w10: v1(1979.52,3287) 2029,3287 2113,3371 2155,3371 2160,3366 2195,3366 2205,3376 2205,3387.94 2216,3398.94 J1.26@2254.96,3398.94
DCMI_D7: J1.27 U1.168 | length 809.3
  Top Layer w10: v1(1776,3430.43) 1776,3381 1809,3348 1936,3348 1963.52,3375.52 1963.52,3397 1963,3397.52 1963,3408 1959.71,3408 U1.168@1959.71,3440.29
  Bottom Layer w10: v1(1776,3430.43) J1.27@2254.96,3430.43
DCMI_HREF: J2.3 U1.85 | length 1273.3
  Top Layer w10: U1.85@2589.63,2431.2 v1(2589.63,2481)
  Bottom Layer w10: v1(2589.63,2481) 2636.67,2433.96 2721.5,2433.96 2736.54,2449 3361.05,2449 3388.55,2476.5 3435.55,2476.5 3442.59,2469.46 3482.19,2469.46 3605,2592.27 3605,2656 3596.47,2664.53 J2.3@3555,2664.53
DCMI_PLCK: J1.47 U1.52 | length 1021.3
  Top Layer w10: U1.52@1940.02,2431.2 1940.02,2615.41 1999.64,2675.03 2124.99,2675.03 2132.49,2682.53 2201.52,2682.53 2226.39,2707.41 2226.39,2768.07 2361.77,2903.45 2361.77,2934.76 2464.01,3037 v1(2490.99,3037)
  Bottom Layer w10: J1.47@2440,3020.99 2474.97,3020.99 v1(2490.99,3037)
DCMI_RESET: J1.25 J1.41 U1.138 U1.165 | length 1697.6
  Top Layer w10: U1.165@2018.76,3440.29 2018.76,3289.24 2204,3104 2385,3104 v1(2491,3210) ; v1(2550,3490.26) 2550.26,3490 U1.138@2550.26,3440.29
  Layer 2 w10: v1(2491,3210) 2455,3246 2455,3542 2515,3587 2550,3552 v1(2550,3490.26)
  Bottom Layer w10: J1.25@2254.96,3367.44 2299.56,3367.44 2300,3367 2329,3367 2348.04,3347.96 2348.04,3229.92 2368,3209.96 J1.41@2440,3209.96 v1(2491,3210) v1(2491,3210)
DCMI_SCL: J1.22 U1.162 | length 487
  Top Layer w10: U1.162@2077.82,3440.29 2077.82,3489.82 v1(2078,3490)
  Layer 2 w10: v1(2078,3490) 2034,3446 2034,3328 2050,3312 2149,3312 v1(2204,3257)
  Bottom Layer w10: v1(2204,3257) 2219.95,3272.95 J1.22@2254.96,3272.95
DCMI_SDA: J1.21 U1.161 | length 365.9
  Top Layer w10: U1.161@2097.5,3440.29 2097.5,3296.5 2145.03,3248.97 2145.03,3232.03 v1(2168.53,3208.53)
  Bottom Layer w10: v1(2168.53,3208.53) 2193.5,3233.5 2227.5,3233.5 2227.5,3241.46 J1.21@2254.96,3241.46
DCMI_XCLK: J2.20 U1.119 | length 996.9
  Top Layer w10: U1.119@2730,3103.07 2830.07,3103.07 2863,3136 v1(2863,3189)
  Bottom Layer w10: v1(2863,3189) 2934,3189 3033,3288 3296,3288 3317,3267 3317,3235 3363,3189 3454.04,3189 3465,3199.96 J2.20@3555,3199.96
ETH_MDC: J1.9 U1.33 | length 697.9
  Top Layer w10: v1(1671,2729) 1671.05,2729.05 U1.33@1720.91,2729.05
  Bottom Layer w10: v1(1671,2729) 1681.5,2739.5 1863.57,2739.5 1910.57,2786.5 1928.58,2786.5 2013.59,2871.51 2179.5,2871.51 2191,2860 2217,2863.5 J1.9@2254.96,2863.5
ETH_MDIO: J1.4 U1.42 | length 733.9
  Top Layer w10: U1.42@1720.91,2551.89 1766.4,2551.89 v1(1782.51,2568)
  Layer 1 w10: v1(1782.51,2568) 1819,2604.49 1819,2684 1805,2698 1805,2721.5 1816,2732.5 1855.48,2732.5 1904.98,2683 2164.98,2683 v1(2196,2714.02)
  Bottom Layer w10: v1(2196,2714.02) 2204,2706.02 J1.4@2254.96,2706.02
FMC_A0: U1.16 U3.23 | length 1860.3
  Top Layer w10: U1.16@1720.91,3063.7 1811.3,3063.7 v1(2114,2761) ; v1(3316.95,2687.05) 3349.05,2719.16 U3.23@3349.05,2762.44
  Layer 1 w10: v1(2114,2761) 2280.5,2761 2312.5,2729 2530.5,2729 2554.05,2752.55 3251.45,2752.55 v1(3316.95,2687.05)
FMC_A1: U1.17 U3.24 | length 1973
  Top Layer w10: v1(1671,3052) 1678.98,3044.02 U1.17@1720.91,3044.02 ; v1(3119,2918) 3279.56,2918 3317.56,2880 U3.24@3317.56,2762.44
  Layer 1 w10: v1(1671,3052) 1755,3052 1795,3092 1983,3092 2159.85,2915.15 2340.3,2915.15 2359.15,2934 2669,2934 2712,2977 3060,2977 v1(3119,2918)
FMC_A2: U1.18 U3.25 | length 1931.6
  Top Layer w10: U1.18@1720.91,3024.33 1797.67,3024.33 v1(1813,3009) ; U3.25@3286.06,2762.44 3286.06,2823.18 v1(3287,2824.12)
  Layer 1 w10: v1(1813,3009) 1813,2811 1855.5,2768.5 2033.69,2768.5 2049.69,2784.5 2288.5,2784.5 2328,2745 2514.5,2745 2538.05,2768.55 2686.55,2768.55 2730,2812 2849,2812 2880,2781 3243.88,2781 v1(3287,2824.12)
FMC_A3: U1.19 U3.26 | length 1996.4
  Top Layer w10: v1(1647,3004.65) U1.19@1720.91,3004.65 ; v1(3206.57,2883) 3254.57,2835 U3.26@3254.57,2762.44
  Layer 1 w10: v1(1647,3004.65) 1647,3066 1708,3127 2188,3127 2207,3108 2462.77,3108 2564.27,3006.5 2691.5,3006.5 2733.5,3048.5 3041.07,3048.5 v1(3206.57,2883)
FMC_A4: U1.20 U3.29 | length 2502.3
  Top Layer w10: U1.20@1720.91,2984.96 1838,2984.96 2010.19,2812.77 v1(2010.19,2792) ; v1(3254.57,2234.43) U3.29@3254.57,2290
  Layer 2 w10: v1(2010.19,2792) 2010.19,2737.43 2076.6,2671.02 2216.87,2671.02 2466.85,2921 2529,2921 2550,2900 2550,2863 2530.5,2843.5 2530.5,2731.08 2516,2716.58 2516,2383 2589.5,2309.5 3179.5,2309.5 v1(3254.57,2234.43)
FMC_A5: U1.21 U3.30 | length 2834
  Top Layer w10: v1(1534,2768.29) 1534,2840 1542,2848 1555,2848 1587,2880 1587,2961.16 1591.25,2965.41 1643.4,2965.41 1643.53,2965.28 U1.21@1720.91,2965.28 ; v1(3286,2397) 3286.06,2396.94 U3.30@3286.06,2290
  Layer 1 w10: v1(1534,2768.29) 1692.41,2768.29 1708.71,2752 1708.71,2584.29 1749,2544 1906,2544 2013,2651 2217,2651 2228,2640 2228,2608 2212,2592 2181,2592 2140,2551 2128,2551 2117,2540 2117,2479.5 2159.5,2437 2639.46,2437 2658.5,2417.96 3265.04,2417.96 v1(3286,2397)
FMC_A6: U1.60 U3.31 | length 1458.5
  Top Layer w10: v1(2097.5,2381) U1.60@2097.5,2431.2 ; U3.31@3317.56,2290 3317.56,2233.44 v1(3318,2233)
  Layer 1 w10: v1(2097.5,2381) 2137.22,2420.72 2623.74,2420.72 2642.5,2401.96 3211.18,2401.96 3318,2295.14 v1(3318,2233)
FMC_A7: U1.63 U3.32 | length 1595.4
  Top Layer w10: U1.63@2156.56,2431.2 2156.56,2480.56 v1(2157,2481) ; v1(3296,2166) 3349.05,2219.05 U3.32@3349.05,2290
  Layer 2 w10: v1(2157,2481) 2167,2471 2210.43,2471 2280.93,2541.5 2299,2529 2299,2404.72 2362,2341.72 2499.28,2341.72 2552,2289 3164,2289 3287,2166 v1(3296,2166)
FMC_A8: U1.64 U3.33 | length 1449.3
  Top Layer w10: v1(2176,2381) 2176.24,2381.24 U1.64@2176.24,2431.2 ; v1(3380.55,2225) U3.33@3380.55,2290
  Layer 1 w10: v1(2176,2381) 2199.72,2404.72 2607.28,2404.72 2626.5,2385.5 3182,2385.5 3294.5,2273 3294.5,2218.5 3304,2209 3364.55,2209 v1(3380.55,2225)
FMC_A9: U1.65 U3.34 | length 1475.4
  Top Layer w10: U1.65@2195.93,2431.2 v1(2195.93,2494.5) ; U3.34@3412.05,2290 v1(3412.05,2453)
  Layer 1 w10: v1(2195.93,2494.5) 2233.43,2457 2651.46,2457 2674.5,2433.96 3393.01,2433.96 v1(3412.05,2453)
FMC_A10: U1.66 U3.22 | length 1697.4
  Top Layer w10: v1(2215.61,2314) U1.66@2215.61,2431.2 ; U3.22@3380.55,2762.44 v1(3380.55,2819.45)
  Bottom Layer w10: v1(2215.61,2314) 2288,2314 2341,2367 2341,2413 2380,2452 2380,2537 2432,2589 2490,2589 2606,2705 2704,2705 2739.5,2740.5 3017.07,2740.5 3183.07,2906.5 3293.5,2906.5 v1(3380.55,2819.45)
FMC_A11: U1.67 U3.35 | length 1676.1
  Top Layer w10: v1(2203.3,2552) 2235.3,2520 U1.67@2235.3,2431.2 ; U3.35@3443.54,2290 v1(3443.54,2499)
  Layer 1 w10: v1(2203.3,2552) 2212.8,2542.5 2321.13,2542.5 2366.21,2587.58 2550.39,2587.58 2633.46,2504.5 3104.5,2504.5 3150.5,2458.5 3261.5,2458.5 3302,2499 v1(3443.54,2499)
FMC_A12: U1.106 U3.36 | length 1433.5
  Top Layer w10: v1(2619,2831.17) 2635,2847.17 U1.106@2730,2847.17 ; U3.36@3475.04,2290 v1(3475.04,2372.33)
  Layer 2 w10: v1(2619,2831.17) 2742.54,2831.17 2778.1,2866.72 3007.28,2866.72 3173.67,2700.33 3173.67,2430.66 3232,2372.33 v1(3475.04,2372.33)
FMC_A16_CLE: J2.23 U1.99 U4.16 | length 1641.8
  Top Layer w10: v1(2633,2729) 2633,2713 2641,2705 2682.63,2705 2687,2709.37 U1.99@2730,2709.37 ; U4.16@3217.6,3208.15 3263.15,3208.15 3291.5,3236.5 ; v1(3291.5,3251.5) 3291.5,3236.5 ; v1(3341,3259) 3314,3259 3291.5,3236.5
  Bottom Layer w10: v1(2633,2729) 2589,2773 2589,2960 2625.3,2996.3 2625.3,3104 2650.1,3128.8 2906.8,3128.8 3012,3234 3274,3234 v1(3291.5,3251.5) ; v1(3341,3259) 3376.45,3294.45 J2.23@3555,3294.45
FMC_A17_ALE: J2.21 U1.100 U4.17 | length 1370.5
  Top Layer w10: v1(2664,2729.05) U1.100@2730,2729.05 ; v1(3047.46,3188.46) U4.17@3217.6,3188.46 3264.18,3188.46 3268,3192.28 3400.28,3192.28 v1(3421,3213)
  Bottom Layer w10: v1(2664,2729.05) 2664,2783 2643,2804 2643,2854.37 2605,2892.37 2605,2928.63 2679.36,3002.99 2688,3002.99 2706.01,3021 2706.01,3029.64 2771.87,3095.5 2954.5,3095.5 v1(3047.46,3188.46) ; v1(3421,3213) 3439.46,3231.46 J2.21@3555,3231.46
FMC_A18: J2.14 U1.101 | length 933.6
  Top Layer w10: U1.101@2730,2748.74 2798.74,2748.74 v1(2830,2780)
  Bottom Layer w10: v1(2830,2780) 2942.48,2780 3104,2941.52 3164.52,2941.52 3202.37,2979.37 3356.32,2979.37 3387.93,3010.98 J2.14@3555,3010.98
FMC_BA0: U1.108 U3.20 | length 1172.6
  Top Layer w10: v1(2680,2887) 2680.46,2886.54 U1.108@2730,2886.54 ; v1(3435.54,2819) 3443.54,2811 U3.20@3443.54,2762.44
  Layer 2 w10: v1(2680,2887) 2722.75,2929.75 2722.75,3087.61 2747.15,3112 2936,3112 3102.18,2945.82 3308.73,2945.82 v1(3435.54,2819)
FMC_BA1: U1.109 U3.21 | length 861.5
  Top Layer w10: U1.109@2730,2906.22 2784.78,2906.22 v1(2793,2898) ; v1(3396,2671) 3412.05,2687.05 U3.21@3412.05,2762.44
  Layer 2 w10: v1(2793,2898) 3057.4,2898 3194.4,2761 3306,2761 v1(3396,2671)
FMC_D0: J2.45 U1.104 U3.2 U4.29 | length 2223.8
  Top Layer w10: v1(2680,2801) 2686.79,2807.79 U1.104@2730,2807.79 ; v1(3946.98,3097.05) v1(3946.98,3113.05) 3963.34,3129.41 U4.29@4005,3129.41 ; U3.2@4010.47,2762.44 v1(4010.47,2819)
  Layer 1 w10: v1(2680,2801) 2749.5,2870.5 3132.5,2870.5 3155,2848 3214.56,2848 3230.56,2864 3230.56,2907.28 3262.78,2939.5 3483.69,2939.5 3580.69,2842.5 3768.5,2842.5 3798,2872 3957.47,2872 v1(4010.47,2819)
  Layer 2 w10: v1(3946.98,3097.05) 4010.47,3033.55 v1(4010.47,2819)
  Bottom Layer w10: J2.45@3740.04,3073.98 3907.91,3073.98 v1(3946.98,3113.05)
FMC_D1: J2.46 U1.105 U3.4 U4.30 | length 2102.8
  Top Layer w10: U1.105@2730,2827.48 2788.48,2827.48 v1(2804,2843) ; v1(3858,3042) 3910.78,3094.78 3910.78,3131.47 3928.4,3149.09 U4.30@4005,3149.09 ; U3.4@3947.48,2762.44 v1(3947.48,2819.31)
  Layer 1 w10: v1(2804,2843) 3100,2843 3111,2832 3221.57,2832 3246.56,2856.99 3246.56,2891.28 3257.28,2902 3432,2902 3462.65,2871.35 3528.97,2871.35 3616.32,2784 3912.17,2784 v1(3947.48,2819.31)
  Bottom Layer w10: J2.46@3740.04,3042.48 v1@3857.52,3042.48 ; v1(3858,3042) v1@3857.52,3042.48 ; v1(3947.48,2819.31) 3995,2866.83 3995,3031.48 3984,3042.48 v1@3857.52,3042.48
FMC_D2: J2.47 U1.142 U3.5 U4.31 | length 2763.3
  Top Layer w10: U1.142@2471.52,3440.29 2471.52,3486.5 2464,3512.48 2494.52,3543 v1(2512,3543) ; v1(3791,3010.98) 3791,3048.03 3911.75,3168.78 U4.31@4005,3168.78 v1(4061.87,3168.78) ; U3.5@3915.98,2762.44 3915.98,2703.02 v1(3948,2671)
  Layer 1 w10: v1(2512,3543) 2533.67,3564.67 2627.67,3564.67 2655.5,3592.5 2784.5,3592.5 3039,3338 3380.85,3338 3424.37,3294.48 3507.51,3294.48 v1(3791,3010.98)
  Layer 2 w10: v1(3948,2671) 4000,2671 4046,2717 4046,3152.91 v1(4061.87,3168.78)
  Bottom Layer w10: J2.47@3740.04,3010.98 v1(3791,3010.98)
FMC_D3: J2.48 U1.143 U3.7 U4.32 | length 3792.7
  Top Layer w10: v1(2388,3248) 2451.83,3311.83 U1.143@2451.83,3440.29 ; U3.7@3852.99,2762.44 3852.99,2686.67 3868.99,2670.67 v1(3900.99,2670.67) ; v1(3942,3198) 3951.54,3188.46 U4.32@4005,3188.46
  Layer 1 w10: v1(2388,3248) 2593,3248 2703.5,3137.5 3240.5,3137.5 3359.5,3018.5 3630.5,3018.5 v1(3665,2984)
  Layer 2 w10: v1(3900.99,2670.67) 3931.67,2640 4045,2640 4144,2739 4144,3150 4096,3198 v1(3942,3198)
  Bottom Layer w10: v1(3665,2984) 3669.51,2979.49 J2.48@3740.04,2979.49 3854.86,2979.49 3899.5,3024.13 3966.36,3024.13 3979,3011.49 3979,2890.55 3923,2834.55 3923,2807 3934.19,2795.81 3959.81,2795.81 3986,2822 3986,2829 4011,2854 4011,3048 3982,3077 3982,3158 v1(3942,3198)
FMC_D4: J2.49 U1.68 U3.8 U4.41 | length 4030.7
  Top Layer w10: v1(2254.98,2381.02) U1.68@2254.98,2431.2 ; U3.8@3821.5,2762.44 3821.5,2812 ; v1(3837,2827.5) 3821.5,2812 ; v1(3837,2828) 3821.5,2812.5 3821.5,2812 ; v1(3895,3469) 3895,3376 3916,3355 3944.37,3355 3955,3365.63 U4.41@4005,3365.63
  Layer 2 w10: v1(2254.98,2381.02) 2567,2069 3546,2069 3608,2131 3608,2728.82 3637.22,2758.05 3650.05,2758.05 3742,2850 3742,2873.63 3791,2922.63 v1(3791,2947.99) ; v1(3837,2827.5) 3904.5,2895 3904.5,3024.13 3921.5,3041.13 3921.5,3160.97 3906,3176.47 3906,3221 3908,3223 3968.71,3223 3972,3226.29 3972,3449 3952,3469 v1(3895,3469)
  Bottom Layer w10: J2.49@3740.04,2947.99 v1(3791,2947.99) 3895.49,2947.99 3923.5,2976 3955,2976 3963,2968 3963,2918 3873,2828 v1(3837,2828)
FMC_D5: J2.50 U1.69 U3.10 U4.42 | length 3854.5
  Top Layer w10: v1(2267,2492) 2274.67,2484.33 U1.69@2274.67,2431.2 ; v1(3719.5,2373.5) 3720,2374 3720,2483 3758.5,2521.5 U3.10@3758.5,2762.44 ; v1(3934,3385.31) U4.42@4005,3385.31
  Layer 2 w10: v1(2267,2492) 2231,2456 2231,2351 2632,1950 3478,1950 3719.5,2191.5 v1(3719.5,2373.5) 3701.5,2391.5 3701.5,2722.82 3777.72,2799.04 3777.72,2851.72 v1(3826.5,2900.5) 3888.5,2962.5 3888.5,3040.13 3905.5,3057.13 3905.5,3144.97 3889.5,3160.97 3889.5,3276.14 3934,3320.64 v1(3934,3385.31)
  Bottom Layer w10: J2.50@3740.04,2916.5 3810.5,2916.5 v1(3826.5,2900.5)
FMC_D6: J2.51 U1.70 U3.11 U4.43 | length 3733.3
  Top Layer w10: v1(2250.5,2566) 2294.35,2522.15 U1.70@2294.35,2431.2 ; 3727.01,2622.01 U3.11@3727.01,2762.44 ; U4.43@4005,3405 v1(4078,3405)
  Layer 1 w10: v1(2250.5,2566) 2292,2607.5 2657.5,2607.5 2744.5,2520.5 3142,2520.5 3188,2474.5 3216,2474.5 3264,2522.5 3458.5,2522.5 3519,2462 v1(3754.22,2462) ; v1(3928,2926.5) 3830.5,3024 3830.5,3163.5 3875.57,3208.57 3888,3208.57 3899,3219.57 3899,3246.53 4057.47,3405 v1(4078,3405)
  Layer 2 w10: 3727,2622 3754.22,2649.22 ; v1(3754.22,2462) 3754.22,2649.22 ; v1(3808,2844) 3808,2788.2 3754.22,2734.41 3754.22,2649.22 ; v1(3928,2926.5) 3921,2919.5 3921,2816 3754.22,2649.22
  Bottom Layer w10: v1(3808,2844) 3803.97,2877 ; v1(3928,2926.5) 3878.5,2877 3803.97,2877 ; 3803.97,2877 3803,2877 J2.51@3740.04,2885 3803,2885 3803.97,2877
FMC_D7: J2.52 U1.73 U3.13 U4.44 | length 3009.1
  Top Layer w10: U1.73@2353.41,2431.2 2353.41,2467.41 2374,2488 2374,2492 2386,2504 2386,2713.5 2427.64,2755.14 2427.64,2897.64 2464,2934 2508.36,2934 2545.5,2971.14 v1(2545.5,3072.5) ; U3.13@3664.01,2762.44 3664.01,2856 v1(3677.52,2869.5) ; v1(3948,3421) 3951.68,3424.68 U4.44@4005,3424.68
  Layer 2 w10: v1(2545.5,3072.5) 2688,3072.5 2701.5,3086 2701.5,3099.13 2730.76,3128.39 2958.61,3128.39 3123.54,2963.46 3433.54,2963.46 3445,2952 3461,2952 3495.5,2986.5 3625.41,2986.5 3678,2933.91 3678,2896.43 3708.02,2896.43 3708.02,3154.98 3886.01,3332.96 3886.01,3373.01 3934,3421 v1(3948,3421)
  Bottom Layer w10: v1(3677.52,2869.5) 3693.52,2853.5 3694.5,2853.5 ; 3678,2896.43 3678,2870 3694.5,2853.5 ; J2.52@3740.04,2853.5 3694.5,2853.5
FMC_D8: J2.53 U1.74 U3.42 | length 2201.5
  Top Layer w10: U1.74@2373.09,2431.2 2373.09,2387.91 v1(2381,2380) ; v1(3664,2182) U3.42@3664.01,2290 v1(3664.01,2351.01)
  Layer 1 w10: v1(2381,2380) 2381,2304 2424,2261 v1(2796,2261)
  Layer 2 w10: v1(3664.01,2351.01) 3682,2369 3682,2701 v1(3678,2705)
  Bottom Layer w10: v1(2796,2261) 3648,2261 3664,2245 v1(3664,2182) ; v1(3678,2705) 3678,2804.01 3696,2822.01 J2.53@3740.04,2822.01
FMC_D9: J2.54 U1.75 U3.44 | length 3040.8
  Top Layer w10: U1.75@2392.78,2431.2 2392.78,2480.33 v1(2409.22,2496.78) ; U3.44@3727.01,2290 3727.01,2214.23 3743.01,2198.23 v1(3743.01,2182.23)
  Layer 1 w10: v1(3743.01,2182.23) 3789.24,2136 3947,2136 3989.5,2178.5 3989.5,2695.01 v1(4082.49,2788)
  Bottom Layer w10: v1(2409.22,2496.78) 2528.37,2377.63 2528.37,2352 2810.87,2069.5 3554,2069.5 3643,2158.5 3719.27,2158.5 v1(3743.01,2182.23) ; J2.54@3740.04,2790.51 3907.98,2790.51 3918.68,2779.81 4074.3,2779.81 v1(4082.49,2788)
FMC_D10: J2.55 U1.76 U3.45 | length 3202.7
  Top Layer w10: v1(2412,2381) 2412.46,2381.46 U1.76@2412.46,2431.2 ; U3.45@3758.5,2290 3758.5,2233.5 v1(3759,2233)
  Layer 1 w10: v1(3759,2233) 3798,2272 3832,2272 3886,2218 3886,2208 3903.5,2190.5 3940.5,2190.5 3971,2221 3971,2513.49 3924.49,2560 3924.49,2704 3947.49,2727 3990.63,2727 4058.99,2795.36 4058.99,2800 4070.49,2811.5 4096,2811.5 4105.99,2801.51 4105.99,2763.99 v1(4085,2743)
  Bottom Layer w10: v1(2412,2381) 2412,2323 2681.5,2053.5 3674.5,2053.5 3776,2155 3776,2176 3766.5,2185.5 3766.5,2225.5 v1(3759,2233) ; J2.55@3740.04,2759.02 4068.98,2759.02 v1(4085,2743)
FMC_D11: J2.56 U1.77 U3.47 | length 2563
  Top Layer w10: U1.77@2432.15,2431.2 2432.15,2472.7 2432.72,2473.28 2432.72,2496 2468.72,2532 v1(2480.72,2532) ; U3.47@3821.5,2290 3821.5,2248.5 v1(3835.51,2234.49)
  Layer 2 w10: v1(3835.51,2234.49) 3877,2275.98 3877,2563.96 3845,2595.96 3845,2672 3871,2698 v1(3966,2698)
  Bottom Layer w10: v1(2480.72,2532) 2496.32,2516.41 2496.32,2432.31 2546,2382.63 2546,2368 2556.5,2357.5 2581.5,2357.5 2633.5,2305.5 3764.5,2305.5 v1(3835.51,2234.49) ; J2.56@3740.04,2727.52 3860,2727.52 3889.52,2698 v1(3966,2698)
FMC_D12: J2.57 U1.78 U3.48 | length 2783
  Top Layer w10: U1.78@2451.83,2431.2 2451.83,2318.17 v1(2458,2312) ; v1(3852.99,2197.98) 3852.99,2204.48 3859.5,2210.99 3859.5,2250.99 3852.99,2257.5 U3.48@3852.99,2290 v1(3852.99,2542)
  Bottom Layer w10: v1(2458,2312) 2451,2319 2451,2400 2408,2443 2400,2443 2357,2400 2357,2306 2625.5,2037.5 3692.51,2037.5 v1(3852.99,2197.98) ; J2.57@3740.04,2696.02 3703.02,2696.02 3695,2688 3695,2591 3712,2574 3774.44,2574 3806.44,2542 v1(3852.99,2542)
FMC_D13: J2.58 U1.96 U3.50 | length 2346.1
  Top Layer w10: v1(2659.69,2650.31) U1.96@2730,2650.31 ; v1(3916,2214) U3.50@3915.98,2290
  Layer 1 w10: v1(2659.69,2650.31) 2694.96,2650.31 2792.78,2552.5 2839.24,2552.5 2854.5,2567.76 3421.45,2567.76 3479.06,2625.38 3592.62,2625.38 3608.5,2609.5 3738.94,2609.5 3916,2432.44 v1(3916,2214)
  Layer 2 w10: v1(3869,2612) 3916,2565 v1(3916,2214)
  Bottom Layer w10: J2.58@3740.04,2664.53 3772,2664.53 3779.47,2672 3809,2672 v1(3869,2612)
FMC_D14: J2.59 U1.97 U3.51 | length 1715.8
  Top Layer w10: U1.97@2730,2670 2811,2670 v1(2843,2638) ; v1(3947,2235) 3947.48,2235.48 U3.51@3947.48,2290
  Layer 1 w10: v1(2843,2638) 2862,2619 3407,2619 3469.07,2681.07 3760.65,2681.07 v1(3793.72,2648) 3947,2494.72 v1(3947,2235)
  Bottom Layer w10: J2.59@3740.04,2633.03 3776.04,2633.03 3791,2648 v1(3793.72,2648)
FMC_D15: J2.60 U1.98 U3.53 | length 2401.6
  Top Layer w10: v1(2679,2677) 2691.68,2689.68 U1.98@2730,2689.68 ; U3.53@4010.47,2290 4010.47,2343.47 v1(4038,2371)
  Layer 1 w10: v1(2679,2677) 2768,2677 2842.69,2602.31 3422.65,2602.31 3485.4,2665.07 3730.93,2665.07 v1(3826,2570)
  Layer 2 w10: v1(3826,2570) 3826,2347.5 3735.5,2257 3735.5,2216 3743.5,2208 3758,2208 3852,2114 3897,2114 4038,2255 v1(4038,2371)
  Bottom Layer w10: J2.60@3740.04,2601.54 3794.46,2601.54 v1(3826,2570)
FMC_NBL0: J2.43 U1.169 U3.15 | length 3162.8
  Top Layer w10: v1(1940.02,3391) U1.169@1940.02,3440.29 ; U3.15@3601.02,2762.44 3601.02,2663.98 v1(3632,2633)
  Layer 1 w10: v1(1940.02,3391) 2092,3542.98 2092,3616 2162,3686 2444.5,3686 2445.5,3685 2527,3685 2552,3660 3260,3660 3400.5,3519.5 3516.5,3519.5 3569,3467 3569,3359 v1(3791,3137)
  Layer 2 w10: v1(3632,2633) 3632,2719.27 3654,2741.27 3694.87,2741.27 3758.17,2804.57 3758.17,2867.17 3815,2924 3815,3113 v1(3791,3137)
  Bottom Layer w10: J2.43@3740.04,3136.97 v1(3791,3137)
FMC_NBL1: J2.44 U1.170 U3.39 | length 3880.2
  Top Layer w10: U1.170@1920.34,3440.29 1920.34,3482.34 1982.76,3544.76 v1(1982.76,3630) ; U3.39@3569.53,2290 3569.53,2235.47 v1(3570,2235)
  Layer 1 w10: v1(1982.76,3630) 2054.76,3702 2460.5,3702 2461.5,3701 2882.72,3701 2902.43,3681.29 3357.71,3681.29 3483,3556 3602.22,3556 3638.22,3520 3638.22,3444.92 3780.68,3302.45 3813.26,3302.45 3850,3265.71 v1(3850,3249.71)
  Layer 2 w10: v1(3570,2235) 3570,2741.48 3626.66,2798.14 3658.55,2798.14 3722.4,2861.99 3722.4,2887.22 3744,2908.81 3744,3129 3776,3161 3803.09,3161 3859.09,3105 v1(3882,3105)
  Bottom Layer w10: J2.44@3740.04,3105.47 3850,3105.47 ; v1(3850,3249.71) 3881.5,3218.21 3881.5,3136.97 3850,3105.47 ; v1(3882,3105) 3881.53,3105.47 3850,3105.47
FMC_NCE3: R17.2 U1.152 U4.9 | length 1333.4
  Top Layer w10: U1.152@2274.67,3440.29 2274.67,3367 v1(2310.67,3331) ; R17.2@3065,3520 v1(3113,3520) 3116,3517 3116,3392 3162.06,3345.94 U4.9@3217.6,3345.94
  Layer 1 w10: v1(2310.67,3331) 2539,3331 v1(2576,3294)
  Bottom Layer w10: v1(2576,3294) 2642,3294 2714,3366 2738,3366 2892,3520 v1(3113,3520)
FMC_NE1: J1.35 U1.151 | length 1124.8
  Top Layer w10: U1.151@2294.35,3440.29 2294.35,3477.19 2281.91,3489.63 2281.91,3542.33 2304,3564.42 2304,3663 2336,3695 2400,3695 2441,3654 2441,3613 2475,3579 2704,3579 2723.78,3559.22 2723.78,3517.78 v1(2708,3502)
  Bottom Layer w10: J1.35@2440,3398.94 2505,3398.94 2535.56,3429.5 2632,3429.5 2672,3469.5 2675.5,3469.5 v1(2708,3502)
FMC_NOE: J2.26 U1.146 U4.8 | length 1593.5
  Top Layer w10: U1.146@2392.78,3440.29 2392.78,3507.79 2405,3520.01 v1(2405,3646.5) ; U4.8@3217.6,3365.63 3278.63,3365.63 v1(3309,3396)
  Layer 1 w10: v1(2405,3646.5) 2453,3598.5 2597.5,3598.5 2623.5,3624.5 3080.5,3624.5 v1(3309,3396) v1(3503.94,3396)
  Bottom Layer w10: v1(3503.94,3396) 3511,3388.94 J2.26@3555,3388.94
FMC_NWAIT: J2.27 U1.150 U4.7 | length 1691.9
  Top Layer w10: U1.150@2314.04,3440.29 2314.04,3489.04 v1(2326.42,3501.42) ; v1(3158,3385) 3158.31,3385.31 U4.7@3217.6,3385.31
  Layer 1 w10: v1(2326.42,3501.42) 2340.63,3515.63 2340.63,3571.13 2352,3582.5 2613.5,3582.5 2639.5,3608.5 2934.5,3608.5 v1(3158,3385) 3175,3368 3520,3368 3528,3376 3528,3412 3520,3420 v1(3469,3420)
  Bottom Layer w10: v1(3469,3420) 3469.43,3420.43 J2.27@3555,3420.43
FMC_NWE: J2.22 U1.147 U4.18 | length 1521.9
  Top Layer w10: U1.147@2373.09,3440.29 2373.09,3412.81 2376.22,3409.68 2376.22,3372.11 2373.22,3369.11 v1(2373.22,3355) ; U4.18@3217.6,3168.78 v1(3290.47,3168.78) 3425.78,3168.78 3477.02,3220.02 v1(3477.02,3255)
  Layer 1 w10: v1(2373.22,3355) 2413.14,3394.92 2522.75,3394.92 2613.93,3303.74 2838,3303.74 2984.74,3157 3278.69,3157 v1(3290.47,3168.78)
  Bottom Layer w10: v1(3477.02,3255) 3484.97,3262.95 J2.22@3555,3262.95
FMC_SDCKE0: U1.35 U3.37 | length 2371.9
  Top Layer w10: v1(1647,2673.68) 1663,2689.68 U1.35@1720.91,2689.68 ; v1(3491,2233) 3506.53,2248.53 U3.37@3506.53,2290
  Layer 1 w10: v1(1647,2673.68) 1647,2559 1742,2464 1870,2464 1996,2338 2232,2338 2492,2078 2995,2078 3066,2149 3274,2149 3281,2142 3400,2142 v1(3491,2233)
FMC_SDCLK: U1.112 U3.38 | length 2388.4
  Top Layer w10: v1(2554,2712) 2554,2728 2590,2764 2590,2931.28 2624,2965.28 U1.112@2730,2965.28 ; v1(2698,2458) 2756,2400 2901,2400 2917,2416 2917,2477 3115.72,2477 3143.72,2449 3143.72,2245.72 3131,2233 3131,2207.32 3123.68,2200 3123.68,2106.32 3205,2025 3205,1965 3216,1954 3360,1954 3409,2003 3409,2176 3426,2193 3498.03,2193 3538.03,2233 U3.38@3538.03,2290
  Layer 2 w10: v1(2554,2712) 2554,2602 v1(2698,2458)
FMC_SDNCAS: U1.160 U3.17 | length 2293.2
  Top Layer w10: v1(2117,3554) 2117.19,3553.81 U1.160@2117.19,3440.29 ; U3.17@3538.03,2762.44 3538.03,2798.03 3560,2820 3584,2820 3607,2843 v1(3607,2866)
  Layer 1 w10: v1(2117,3554) 2117,3488 2159.5,3445.5 2648,3445.5 2672,3469.5 2844.5,3469.5 3012,3302 3207.75,3302 3459.75,3050 3648,3050 3689,3009 3689,2948 v1(3607,2866)
FMC_SDNE0: R19.2 U1.34 U3.19 | length 2321.5
  Top Layer w10: U1.34@1720.91,2709.37 v1(1771,2709.37) ; R19.2@3374.94,2875 R19.2@3374.94,2848 ; v1(3451,2848) R19.2@3374.94,2848 ; U3.19@3475.04,2762.44 3475.04,2842.31 3471.35,2846 3374.94,2846 R19.2@3374.94,2848
  Layer 1 w10: v1(1771,2709.37) 1771,2746 1773.5,2748.5 1882.5,2748.5 1920,2711 2130.5,2711 2160.75,2741.25 2275.27,2741.25 2315.52,2701 2502,2701 2530.5,2672.5 2577.5,2672.5 2606.5,2701.5 2830.5,2701.5 2897,2635 3356.5,2635 3372,2650.5 3372,2767 3412,2807 3412,2832 3428,2848 v1(3451,2848)
FMC_SDNRAS: U1.59 U3.18 | length 3127
  Top Layer w10: U1.59@2077.82,2431.2 2077.82,2522.22 v1(2081.01,2525.41) ; v1(3228.82,1978) 3228.82,2104.18 3183,2150 3183,2383.43 3506.53,2706.96 U3.18@3506.53,2762.44
  Bottom Layer w10: v1(2081.01,2525.41) 2012.6,2457 1855,2457 1782.5,2384.5 1782.5,2175.5 1980,1978 v1(3228.82,1978)
FMC_SDNWE: U1.32 U3.16 | length 2128.5
  Top Layer w10: U1.32@1720.91,2748.74 1789.26,2748.74 v1(1829,2709) ; v1(3514,2539) 3569.53,2594.53 U3.16@3569.53,2762.44
  Layer 1 w10: v1(1829,2709) 1871,2667 2509,2667 2552,2624 2663.63,2624 2751.13,2536.5 2853.5,2536.5 2856,2539 v1(3514,2539)
GBC_KEY: J1.15 U1.13 | length 568.2
  Top Layer w10: U1.13@1720.91,3122.76 1748,3122.76 1748,3126 1763.5,3126 1764,3126.5 2102.98,3126.5 v1(2177,3052.48)
  Bottom Layer w10: v1(2177,3052.48) J1.15@2254.96,3052.48
GBC_LED: J1.45 U1.50 | length 1278
  Top Layer w10: v1(1900.65,2335.58) U1.50@1900.65,2431.2
  Layer 2 w10: v1(1900.65,2335.58) 1951.58,2386.5 1951.58,2805.45 1986.12,2840 2079,2840 2114,2805 2210,2805 2317,2912 v1(2317,2939)
  Bottom Layer w10: v1(2317,2939) 2317,3012 2388.98,3083.98 J1.45@2440,3083.98